# Altium PCB EE194_YESDIG_PCB.PcbDoc
Units mil, origin at the board's own origin, x right, y up, seen from the top; angles counter-clockwise.
Board outline 1999.9 x 1998.7 mil, 2 copper layers (Top Layer, Bottom Layer); 48 components, 59 nets, 226 pads, 72 vias.
Unrouted connection lines stored in the file: 50.
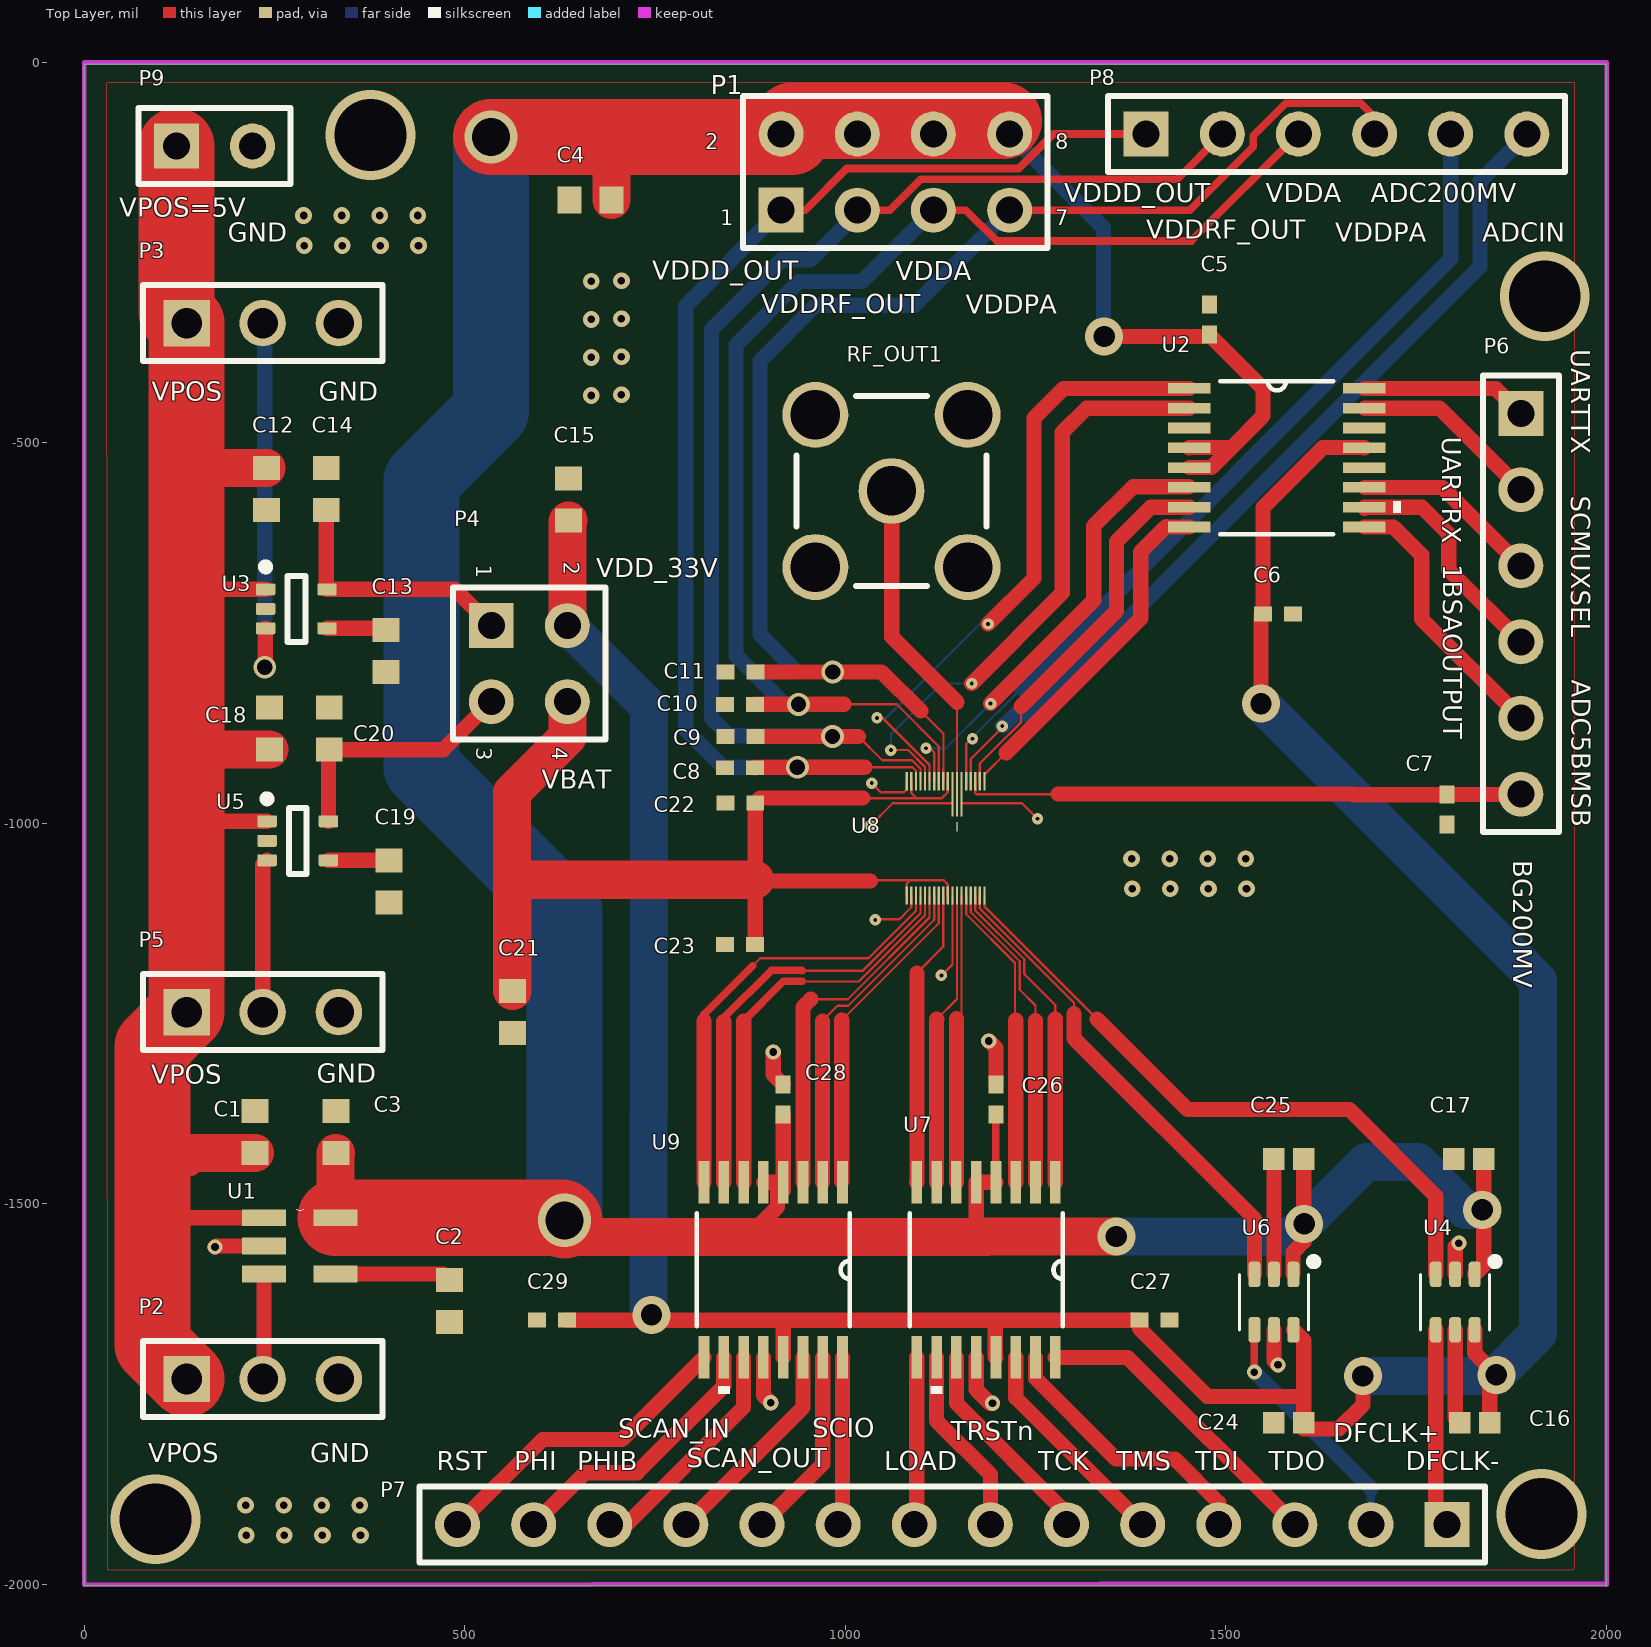
[diagram p0: Top Layer view]
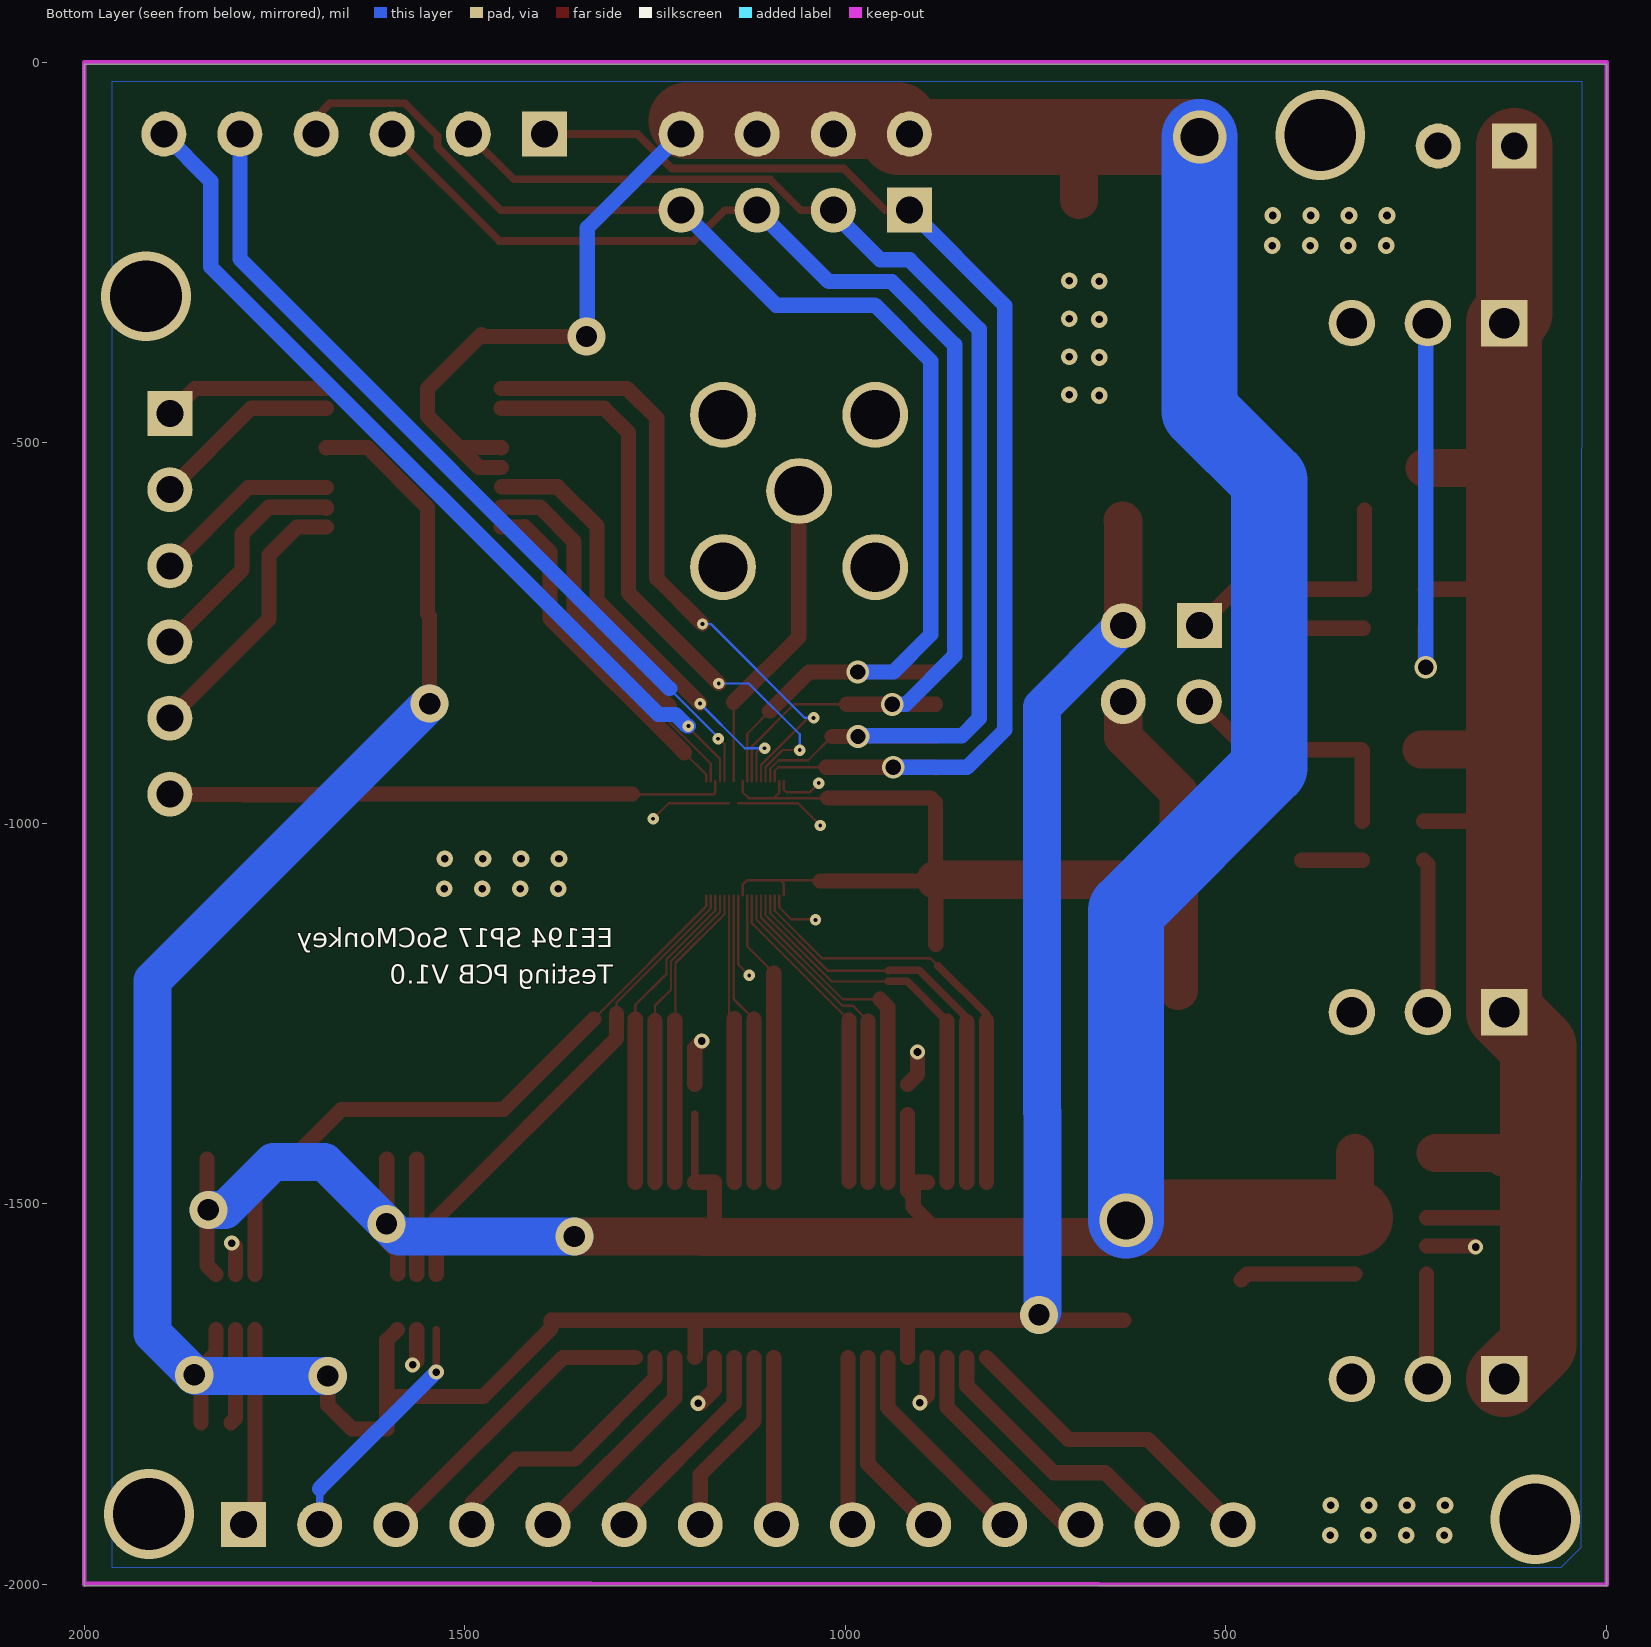
[diagram p1: Bottom Layer view, seen from below]

## Layer stack, top to bottom
Top Solder: solder mask 0.4, Solder Resist, Dk 3.5
Top Layer: signal copper 1.4
Dielectric 1: dielectric 12.6, FR-4, Dk 4.8
Bottom Layer: signal copper 1.4
Bottom Solder: solder mask 0.4, Solder Resist, Dk 3.5

## Board outline
0,-3.1 0,-2001.8 1999.9,-2001.8 1999.9,-3.1

## Design rules (kind name [scope] priority, off if disabled: settings)
Clearance Clearance_1 [InPolygon] p1: gap=10 ignorepadtopadclearanceinfootprint=FALSE
Clearance [All] p2: gap=3 ignorepadtopadclearanceinfootprint=FALSE
MinimumAnnularRing MinimumAnnularRing_Via [IsVia] p1: minimumring=5
MinimumAnnularRing MinimumAnnularRing_Component [All] p2: minimumring=7
MinimumSolderMaskSliver [All] p1: minsoldermaskwidth=3
PolygonConnect [All] p1: connectstyle=Relief reliefconductorwidth=10 reliefentries=4 polygonreliefangle="90 Angle" airgapwidth=10
RoutingVias RoutingVias_Power [(InNet('VPOS') OR InNet('GND') OR InNet('VBAT') OR InNet('VDD_08V') OR InNet('VDD_33V'))] p1: holewidth=50 width=80 viastyle="Through Hole" minholewidth=5 minwidth=15 maxholewidth=100 maxwidth=120
RoutingVias [All] p2: holewidth=10 width=18 viastyle="Through Hole" minholewidth=5 minwidth=15 maxholewidth=20 maxwidth=30
SilkToSilkClearance [All] p1: silktosilkclearance=6
SilkToSolderMaskClearance [IsPad] p1: minsilkscreentomaskgap=6 clearancetoexposedcopper=TRUE
SolderMaskExpansion [All] p1: expansion=4
Width Width_Power [(InNet('VPOS') OR InNet('GND') OR InNet('VBAT') OR InNet('VDD_08V') OR InNet('VDD_33V'))] p1: maxlimit=100 minlimit=3 preferedwidth=50 minimp=50.000000 maximp=50.000000 favimp=50.000000
Width [All] p2: maxlimit=50 minlimit=3 preferedwidth=20 minimp=50.000000 maximp=50.000000 favimp=50.000000
27 further rules are at their usual default settings.

## Components (designator, comment, footprint, x,y, rotation, side; value= is the part's Value field where it differs from the comment)
C1 "Cap Semi" 1608[0603] 224.41,-1405.51 r270 top value=1uF
C2 "Cap Semi" 1608[0603] 480,-1627.44 r90 top value=10nF
C3 "Cap Semi" 1608[0603] 330.71,-1405.51 r270 top value=1uF
C4 "Cap Semi" 1608[0603] 665.35,-181.1 r0 top value=1uF
C5 "Cap Semi" 0402 1478.1,-338.3 r270 top value=100nF
C6 "Cap Semi" 0402 1568.5,-724.9 r180 top value=1uF
C7 "Cap Semi" 0402 1790.4,-981.8 r90 top value=100nF
C8 "Cap Semi" 0402 861.8,-927 r0 top value=100nF
C9 "Cap Semi" 0402 862.4,-885.8 r0 top value=100nF
C10 "Cap Semi" 0402 861.8,-843.7 r0 top value=100nF
C11 "Cap Semi" 0402 862.2,-801.1 r0 top value=100nF
C12 "Cap Semi" 1608[0603] 239.38,-560.76 r90 top value=1uF
C13 "Cap Semi" 1608[0603] 396.86,-773.35 r90 top value=10nF
C14 "Cap Semi" 1608[0603] 318.12,-560.76 r270 top value=1uF
C15 "Cap Semi" 1608[0603] 636.1,-574.6 r270 top value=1uF
C16 "CAP 1uF 16V 0402(1005)" CAPC0402(1005)60_M 1826.77,-1787.4 r180 top value=1uF
C17 "CAP 1uF 16V 0402(1005)" CAPC0402(1005)60_M 1818.9,-1440.94 r180 top value=1uF
C18 "Cap Semi" 1608[0603] 243.32,-875.72 r270 top value=1uF
C19 "Cap Semi" 1608[0603] 400.8,-1076.5 r90 top value=10nF
C20 "Cap Semi" 1608[0603] 322.06,-875.72 r270 top value=1uF
C21 "Cap Semi" 1608[0603] 562.99,-1248.03 r90 top value=1uF
C22 "Cap Semi" 0402 862,-973.1 r0 top value=100nF
C23 "Cap Semi" 0402 861.8,-1159 r0 top value=100nF
C24 "CAP 1uF 16V 0402(1005)" CAPC0402(1005)60_M 1582.68,-1787.4 r180 top value=1uF
C25 "CAP 1uF 16V 0402(1005)" CAPC0402(1005)60_M 1582.68,-1440.94 r180 top value=1uF
C26 "Cap Semi" 0402 1197.8,-1362.8 r270 top value=100nF
C27 "Cap Semi" 0402 1406.3,-1652.7 r180 top value=1uF
C28 "Cap Semi" 0402 918.4,-1362.7 r270 top value=100nF
C29 "Cap Semi" 0402 614.4,-1652.7 r0 top value=1uF
P1 "Header 4X2" HDR2X4 915.75,-194.49 r0 top
P2 "TSW-103-07-F-S" SMTC-TSW-103-07-X-S 134.65,-1730 r0 top
P3 "TSW-103-07-F-S" SMTC-TSW-103-07-X-S 134.65,-342.9 r0 top
P4 "Header 2X2" HDR2X2 534.9,-740.2 r270 top
P5 "TSW-103-07-F-S" SMTC-TSW-103-07-X-S 134.65,-1248.03 r0 top
P6 "Header 6" HDR1X6 1887.4,-461.72 r270 top
P7 "Header 14" HDR1X14 1790.55,-1921.26 r180 top
P8 "Header 6" HDR1X6 1395.28,-94.49 r0 top
P9 "Header 2" HDR1X2 121.26,-110.24 r0 top
RF_OUT1 "32K101-400L5" ROS-32K101-400L5_V 1060.7,-563.4 r0 top
U1 "LDK130M08R" SOT95P290X145-5N 283.46,-1555.12 r0 top
U2 "MAX13003EEUE-T" 21-0066J_16 1566.93,-519.68 r0 top value=Value
U3 "TPS71733DCKR" DCK0005A_L 278.75,-718.24 r0 top
U4 "74AVC1T45" ONSC-SC-88-6-419B-02_L 1826.77,-1592.52 r180 top
U5 "TPS71712DCKR" DCK0005A_L 280.68,-1022.96 r0 top
U6 "74AVC1T45" ONSC-SC-88-6-419B-02_L 1588.58,-1592.52 r180 top
U7 "MAX13003EEUE-T" 21-0066J_16 1184.92,-1586.61 r270 top value=Value
U8 "194_Digital" "EE194_Analog_Chip - 3 mil" 1141.73,-1019.69 r0 top
U9 "MAX13003EEUE-T" 21-0066J_16 905.39,-1586.61 r270 top value=Value

## Footprints (in the part's own frame and the unit in brackets; to place one, negate y for a bottom-side part, rotate by r counter-clockwise, add the part's x,y. Pads: shape width x height; smd on the part's side, far side on the other; paste and mask are expansions set on the pad)
21-0066J_16 [mil]
  rect 56x14 smd mask+3.5: 1(-115,91) 2(-115,65) 3(-115,39) 4(-115,13) 5(-115,-13) 6(-115,-39) 7(-115,-65) 8(-115,-91) 9(115,-91) 10(115,-65) 11(115,-39) 12(115,-13) 13(115,13) 14(115,39) 15(115,65) 16(115,91)
  silkscreen extent -74,-100 163,100
0402 [mm] "Chip Capacitor, Body 1.0x0.5mm, IPC High Density"
  rect 0.6x0.5 smd: 1(-0.5,0) 2(0.5,0)
  body extent -0.55,-0.3 0.55,0.3, height 1.3
1608[0603] [mm] "Chip Capacitor, Body 1.6x0.8mm, IPC High Density"
  rect 0.8x0.9 smd: 1(-0.7,0) 2(0.7,0)
  body extent -0.87,-0.48 0.87,0.48, height 1.3
CAPC0402(1005)60_M [mm] "Chip Capacitor, Body 1.0x0.5mm, Height 0.6mm, IPC Low Density"
  rect 0.72x0.72 smd: 1(-0.5,0) 2(0.5,0)
  body extent -0.55,-0.3 0.55,0.3, height 0.6
DCK0005A_L [mm] "SOT23, 5-Leads, Body 2.15x1.4mm, Pitch 0.65mm, IPC High Density"
  rrect25% 0.65x0.4 smd mask+0.061: 1(-1.025,0.65) 2(-1.025,0) 3(-1.025,-0.65) 4(1.025,-0.65) 5(1.025,0.65)
  silkscreen extent -1.15,-1.1 0.3,1.52, body extent -1.14,-1 1.14,1, height 0.94
"EE194_Analog_Chip - 3 mil" [mil]
  rect 3x24 smd paste-3 mask+4: 1(-61,75) 2(-55,75) 3(-49,75) 4(-43,75) 5(-37,75) 6(-31,75) 7(-25,75) 8(-19,75) 9(-13,75) 10(-7,75) 11(-1,75) 12(5,75) 13(11,75) 14(17,75) 15(23,75) 16(29,75) 17(35,75) 18(41,75) 19(41,-75) 20(35,-75) 21(29,-75) 22(23,-75) 23(17,-75) 24(11,-75) 25(5,-75) 26(-1,-75) 27(-7,-75) 28(-13,-75) 29(-19,-75) 30(-25,-75) 31(-31,-75) 32(-37,-75) 33(-43,-75) 34(-49,-75) 35(-55,-75) 36(-61,-75)
  rect 3x35 smd paste-3 mask-3: 11(-1,46) 12(5,46) 13(11,46)
  silkscreen extent 5,9 5,21
HDR1X2 [mm] "Connector; Header; 2 Position"
  rect 1.5x1.5 hole 0.9: 1(0,0)
  round 1.5 hole 0.9: 2(2.54,0)
  silkscreen extent -1.27,-1.27 3.81,1.27
HDR1X6 [mm] "Connector; Header; 6 Position"
  rect 1.5x1.5 hole 0.9: 1(0,0)
  round 1.5 hole 0.9: 2(2.54,0) 3(5.08,0) 4(7.62,0) 5(10.16,0) 6(12.7,0)
  silkscreen extent -1.27,-1.27 13.97,1.27
HDR1X14 [mm] "Connector; Header; 14 Position"
  rect 1.5x1.5 hole 0.9: 1(0,0)
  round 1.5 hole 0.9: 2(2.54,0) 3(5.08,0) 4(7.62,0) 5(10.16,0) 6(12.7,0) 7(15.24,0) 8(17.78,0) 9(20.32,0) 10(22.86,0) 11(25.4,0) 12(27.94,0) 13(30.48,0) 14(33.02,0)
  silkscreen extent -1.27,-1.27 34.29,1.27
HDR2X2 [mm] "Connector; Header; 2x2 Position"
  rect 1.5x1.5 hole 0.9: 1(0,0)
  round 1.5 hole 0.9: 2(0,2.54) 3(2.54,0) 4(2.54,2.54)
  silkscreen extent -1.27,-1.27 3.81,3.81
HDR2X4 [mm] "Connector; Header; 4x2 Position"
  rect 1.5x1.5 hole 0.9: 1(0,0)
  round 1.5 hole 0.9: 2(0,2.54) 3(2.54,0) 4(2.54,2.54) 5(5.08,0) 6(5.08,2.54) 7(7.62,0) 8(7.62,2.54)
  silkscreen extent -1.27,-1.27 8.89,3.81
ONSC-SC-88-6-419B-02_L [mm] "SOT363, 6-Leads, Body 2x1.25mm, Pitch 0.65mm, IPC High Density"
  rrect50% 0.4x0.85 smd mask+0.061: 1(0,0) 2(0.65,0) 3(1.3,0) 4(1.3,1.85) 5(0.65,1.85) 6(0,1.85)
  silkscreen extent -0.8,-0.55 1.8,1.85, body extent -0.43,-0.38 1.73,2.22, height 1.1
ROS-32K101-400L5_V [mm] "SMA Straight Jack, 6.35x6.35x9.5mm, Rosenberger Recommended"
  round 2.2 hole 1.65: 1(0,0) MH(-2.54,-2.54) MH(-2.54,2.54) MH(2.54,-2.54) MH(2.54,2.54)
  silkscreen extent -3.17,-3.18 3.18,3.17, body extent -3.17,-3.17 3.18,3.18, height 9.5
SMTC-TSW-103-07-X-S [mm] ".025 SQ Post Terminal Strip Assembly, 1x3 Pins, Vertical, 2.54mm Pitch, Male"
  rect 1.55x1.55 hole 1.02: 1(0,0)
  round 1.55 hole 1.02: 2(2.54,0) 3(5.08,0)
  silkscreen extent -1.46,-1.27 6.54,1.27, body extent -1.27,-1.27 6.35,1.27, height 8.38
SOT95P290X145-5N [mil]
  rect 58x22 smd: 1(-47,37) 2(-47,0) 3(-47,-37) 4(47,-37) 5(47,37)
  silkscreen extent -5,47 5,48

## Part data
C1 C2 C3 C4 C5 C6 C7 C8 C9 C10 C11 C12 C13 C14 C15 C18 C19 C20 C21 C22 C23 C26 C27 C28 C29: "Capacitor (Semiconductor SIM Model)", LatestRevisionDate=29-May-2009, LatestRevisionNote="IPC-7351 Footprint Added.", PackageDescription="Chip Capacitor", PackageReference=C1206, Published=8-Jun-2000, Publisher="Altium Limited"
C16 C17 C24 C25: library part CMP-1034-02119-1, "CAP 1uF 16V ±10% 0402 (1005 Metric) Thickness 0.6mm SMD", Case-EIA=0402, Case-Metric=1005, Rated Voltage="16 V", Tolerance=±10%, Max Thickness="0.6 mm", Technology=SMT
P1: "Header, 4-Pin, Dual row", LatestRevisionDate=17-Jul-2002, LatestRevisionNote="Re-released for DXP Platform.", Publisher="Altium Limited"
P2 P3 P5: library part CMP-1024-00331-1, "0.025\" SQ Post Header, Through-hole, Vertical, -55 to 125 degC, 2.54 mm Pitch, 3-Pin, Male, RoHS", Manufacturer=Samtec, Temperature Range="-55 to 125 degC", ComponentLink1Description="Manufacturer URL", ComponentLink1URL=http://www.samtec.com, ComponentLink2Description=Datasheet, ComponentLink2URL=http://www.samtec.com/documents/webfiles/pdf/TSW_TH.PDF, ComponentLink3Description="Package Specification", ComponentLink3URL=http://www.samtec.com/documents/webfiles/cpdf/TSW-XXX-XX-XXX-X-XX-XXX-MKT.pdf, DatasheetVersion=F-214, Mounting Technology=Through-hole, Orientation=Vertical, PackageDescription=".025[0.64] SQ. Post Terminal Strip Assembly", PackageReference=TSW-103-07-X-S, PackageVersion="DM, 8/1988", PartNumber=TSW-103-07-F-S, Pitch="2.54 mm", RoHS=True
P4: "Header, 2-Pin, Dual row", LatestRevisionDate=17-Jul-2002, LatestRevisionNote="Re-released for DXP Platform.", Publisher="Altium Limited"
P6 P8: "Header, 6-Pin", LatestRevisionDate=17-Jul-2002, LatestRevisionNote="Re-released for DXP Platform.", Publisher="Altium Limited"
P7: "Header, 14-Pin", LatestRevisionDate=17-Jul-2002, LatestRevisionNote="Re-released for DXP Platform.", Publisher="Altium Limited"
P9: "Header, 2-Pin", LatestRevisionDate=17-Jul-2002, LatestRevisionNote="Re-released for DXP Platform.", Publisher="Altium Limited"
RF_OUT1: library part CMP-0751-00001-1, "SMA Straight Jack, Up to 18 GHz, -55 to 155 degC", Manufacturer=Rosenberger, ComponentLink1Description="Manufacturer URL", ComponentLink1URL=http://www.rosenberger.de, ComponentLink2Description=Datasheet, ComponentLink2URL=http://rosenberger.de/ok/images/documents/db/32K101-400L5.pdf, ComponentLink3Description="Package Specification", ComponentLink3URL=http://rosenberger.de/ok/images/documents/db/32K101-400L5.pdf, ComponentLink4Description="Series Overview / Design Note", ComponentLink4URL=http://rosenberger.de/ok/images/documents/spez/32.pdf, ComponentLink5Description="Webshop / RFQ", ComponentLink5URL=http://www.rosenberger.com/en/contact/sales/, DatasheetVersion=a00, Design Note="Footprint in library is a generic example - only application specific footprint delivers High Performance", Mounting Technology="Through Hole", PackageDescription="SMA Straight Jack, 6.35 x 6.35 x 9.5 mm", PackageReference=32K101-400L5, PackageVersion=a00, PartNumber=32K101-400L5
U1: "300 mA low quiescent current very low noise LDO (800mV)"
U2 U7 U9: "Imported", Manufacturer_Name=Maxim, Manufacturer_Part_Number=MAX13003EEUE-T, RefDes=RefDes, Type=Type, Vendor=Maxim
U3: library part TI-TPS79NXX-YYSOT5, "Single Output High PSRR LDO, 150 mA, Fixed 1.2 V Output, 2.5 to 6.5 V Input, 5-pin SC70 (DCK), -40 to 125 degC, Green (RoHS & no Sb/Br)", Manufacturer="Texas Instruments", PartNumber=TPS71712DCKR, Accuracy(%)=3, Code_JEDEC=MO-203, ComponentLink1Description="Manufacturer URL", ComponentLink1URL=http://www.ti.com/, ComponentLink2Description=Datasheet, ComponentLink2URL=http://www.ti.com/general/docs/lit/getliterature.tsp?genericPartNumber=TPS71712&fileType=pdf, ComponentLink3Description="Package Specification", ComponentLink3URL=http://www.ti.com/litv/pdf/mpds025f, DatasheetVersion=SBVS068G, Eco-Plan="Green (RoHS & no Sb/Br)", Fixed Output Options(V)=1.2, Iout(Max)(A)=0.15, Iq(Typ)(mA)=0.05, Mounting Technology="Surface Mount", PackageDescription="5-Pin Plastic Small-Outline, Body 2 x 1.25 mm, Pitch 0.65 mm", PackageReference=DCK0005A, PackageVersion=4093553-3/G, SubFamily="Single Channel LDO", Vdo(Typ)(mV)=170, Vin(Max)(V)=6.5, Vin(Min)(V)=2.5, Vout Adj(Max)(V)=1.2, Vout Adj(Min)(V)=1.2
U5: library part TI-TPS79NXX-YYSOT5, "Single Output High PSRR LDO, 150 mA, Fixed 1.2 V Output, 2.5 to 6.5 V Input, 5-pin SC70 (DCK), -40 to 125 degC, Green (RoHS & no Sb/Br)", Manufacturer="Texas Instruments", Accuracy(%)=3, Code_JEDEC=MO-203, ComponentLink1Description="Manufacturer URL", ComponentLink1URL=http://www.ti.com/, ComponentLink2Description=Datasheet, ComponentLink2URL=http://www.ti.com/general/docs/lit/getliterature.tsp?genericPartNumber=TPS71712&fileType=pdf, ComponentLink3Description="Package Specification", ComponentLink3URL=http://www.ti.com/litv/pdf/mpds025f, DatasheetVersion=SBVS068G, Eco-Plan="Green (RoHS & no Sb/Br)", Fixed Output Options(V)=1.2, Iout(Max)(A)=0.15, Iq(Typ)(mA)=0.05, Mounting Technology="Surface Mount", PackageDescription="5-Pin Plastic Small-Outline, Body 2 x 1.25 mm, Pitch 0.65 mm", PackageReference=DCK0005A, PackageVersion=4093553-3/G, PartNumber=TPS71712DCKR, SubFamily="Single Channel LDO", Vdo(Typ)(mV)=170, Vin(Max)(V)=6.5, Vin(Min)(V)=2.5, Vout Adj(Max)(V)=1.2, Vout Adj(Min)(V)=1.2

## Via types
v1: diameter 22, hole 10, Top Layer to Bottom Layer, 32 vias
v2: diameter 15, hole 5, Top Layer to Bottom Layer, 13 vias
v3: diameter 50, hole 28, Top Layer to Bottom Layer, 8 vias
v4: diameter 20, hole 10, Top Layer to Bottom Layer, 8 vias
v5: diameter 30, hole 20, Top Layer to Bottom Layer, 5 vias
v6: diameter 118.11, hole 94.49, Top Layer to Bottom Layer, 4 vias
v7: diameter 70, hole 50, Top Layer to Bottom Layer, 2 vias

## Nets (pads, with @x,y where several pads share a name; then routed paths per layer and width w, separated by ;. In a path a pad name is that pad's centre, name@x,y a point inside that pad or via, vN(x,y) a via of type N, cw(c..) or ccw(c..) an arc to the next point about the centre after c; other vN are vias at no path point)
1BSAOUTPUT: U2.7 U8.17 | length 504.3
  Top Layer w3: U8.17 1176.73,-921.47 1197,-901.2 1230.8,-867.39 1230.8,-846.7 ; U2.7@1451.44,-584.2 U2.7
  Top Layer w20: 1230.8,-846.7 1230.8,-846.6 1356.3,-721.1 1356.3,-629.7 1401.32,-584.68 U2.7
1BSAOUTPUT_33: P6.4 U2.10 | length 307.7
  Top Layer w20: U2.10@1681.93,-586.06 U2.10 1757.28,-584.68 1792.7,-620.1 1792.7,-667.02 P6.4
ADC5BMSB: U2.8 U8.18 | length 466.3
  Top Layer w3: U8.18 1182.73,-935.97 1211.5,-907.2 ; U2.8@1450.31,-612.3 U2.8
  Top Layer w20: 1211.5,-907.2 1388,-730.7 1388,-643.7 1421.5,-610.2 1421.99,-610.68 U2.8
ADC5BMSB_33: P6.5 U2.9 | length 358.6
  Top Layer w20: U2.9 1720.28,-610.68 1757.1,-647.5 1757.1,-731.42 P6.5
ADC200MV: P8.5 U8.14 | length 1118.2
  Top Layer w3: U8.14 1158.73,-895.37 1167.1,-887 v2(1167.1,-889)
  Bottom Layer w3: v2(1167.1,-889) 1167.1,-887 1230.7,-823.4 1230.7,-822.8
  Bottom Layer w20: 1230.7,-822.8 1231.3,-822.8 1795.28,-258.82 P8.5
ADCIN: P8.6 U8.15 | length 1167
  Top Layer w3: U8.15 1164.73,-915.47 1206.1,-874.1 v2(1206.1,-872.3)
  Bottom Layer w20: v2(1206.1,-872.3) 1207.9,-872.3 1223.2,-857 1245.6,-857 1833.7,-268.9 1833.7,-156.06 P8.6
ANT: RF_OUT1.1 U8.12 | length 416.9
  Top Layer w3: U8.12@1146.73,-944.69 1146.73,-840.83
  Top Layer w10: RF_OUT1.1 RF_OUT1.1@1061.1,-563.8
  Top Layer w20: RF_OUT1.1@1061.1,-563.8 1061.1,-755.2 1146.73,-840.83
BG200MV: C7.2 P6.6 U8.16 | length 741.7
  Top Layer w3: U8.16 1170.73,-960.31 1172.33,-961.9 1279.1,-961.9 1279.4,-961.6
  Top Layer w20: 1279.4,-961.6 1666.7,-961.6 1667.5,-962.4 1790.11,-962.4 C7.2 ; C7.2@1782.4,-962.11 1887.01,-962.11 P6.6
DIFFCLK+: U6.3 U8.20 | length 647.2
  Top Layer w3: U8.20 1176.73,-1111.88 1300.5,-1235.64 1300.5,-1250.2
  Top Layer w20: 1300.5,-1250.2 1300.5,-1282.6 1537.4,-1519.5 U6.3
DIFFCLK+33: P7.2 U6.4 | length 319.3
  Top Layer w10: v4(1537.4,-1720.9) U6.4
  Bottom Layer w10: P7.2 1690.55,-1874.05
  Bottom Layer w20: v4(1537.4,-1720.9) 1690.55,-1874.05
DIFFCLK-: U4.3 U8.19 | length 868.1
  Top Layer w3: U8.19 1182.73,-1109.33 1182.93,-1109.33 1330.5,-1256.9
  Top Layer w20: 1330.5,-1256.9 1330.5,-1257.1 1449.4,-1376 1662.1,-1376 1775.59,-1489.49 U4.3
DIFFCLK-33: P7.1 U4.4 | length 262.1
  Top Layer w10: P7.1@1775.59,-1906.3 P7.1
  Top Layer w20: P7.1@1775.59,-1906.3 U4.4
GND: C1.1 C2.1 C3.1 C4.1 C5.1 C6.1 C7.1 C8.1 C9.1 C10.1 C11.1 C12.1 C13.1 C14.1 C15.1 C16.2 C17.2 C18.1 C19.1 C20.1 C21.1 C22.1 C23.1 C24.2 C25.2 C26.1 C27.1 C28.1 C29.1 P2.3 P3.3 P5.3 P9.2 RF_OUT1.MH U1.2 U2.12 U3.2 U4.2 U4.5 U5.2 U6.2 U6.5 U7.12 U8.1 U8.11 U8.13 U8.26 U8.35 U9.12 | length 1155.3
  Top Layer w3: v2(1033,-1002.9) 1062.21,-973.69 U8.11@1140.73,-973.69 ; v2(1039.2,-1126.9) 1040.2,-1125.9 1071.2,-1125.9 1086.73,-1110.37 U8.35 ; v2@1041.2,-947.2 v2(1034.8,-947.2) 1047,-959.4 1051.1,-959.4 1051.3,-959.2 1077.2,-959.2 1080.73,-955.67 U8.1 ; v2(1126.3,-1199.8) 1140.73,-1185.37 U8.26 ; U8.13@1152.73,-973.69 1232.09,-973.69 v2(1252.5,-994.1)
  Top Layer w20: v4(172,-1556.6) 173.48,-1555.12 U1.2 ; U9.12 892.39,-1751.49 v4(902,-1761.1) ; v4(905.2,-1300.4) 905.2,-1329.81 C28.1 ; U7.12 1171.92,-1743.62 1190.2,-1761.9 v4(1193.4,-1761.9) ; v4(1188.5,-1285.9) 1197.8,-1295.2 C26.1 ; U6.5 1562.99,-1706.09 v4(1568.4,-1711.5) ; U6.2 C25.2 ; U4.5 1801.18,-1781.5 C16.2 ; U4.2 1801.18,-1556.32 v4(1806,-1551.5)
  other v1: 213.1,-1935.2 263.1,-1935.2 313.1,-1935.2 363.1,-1935.2 212.2,-1895.7 262.2,-1895.7 312.2,-1895.7 362.2,-1895.7 1377,-1086.1 1427,-1086.1 1477,-1086.1 1527,-1086.1 1376.1,-1046.6 1426.1,-1046.6 1476.1,-1046.6 1526.1,-1046.6 666.4,-438 705.9,-437.1 666.4,-388 705.9,-387.1 666.4,-338 705.9,-337.1 666.4,-288 705.9,-287.1 289.3,-241.1 339.3,-241.1 389.3,-241.1 439.3,-241.1 288.4,-201.6 338.4,-201.6 388.4,-201.6 438.4,-201.6
LOAD: U7.8 U8.28 | length 391.3
  Top Layer w3: 1094.1,-1196.5 1128.73,-1161.87 U8.28
  Top Layer w20: U7.8 1094.1,-1471.44 1094.1,-1196.5
LOAD33: P7.8 U7.9 | length 221
  Top Layer w20: P7.8 1093.92,-1917.89 U7.9
NetC2_2: C2.2 U1.4 | length 152.8
  Top Layer w20: U1.4 472.24,-1592.12 C2.2
NetC13_2: C13.2 U3.4 | length 78.6
  Top Layer w10: C13.2@394.89,-743.83 C13.2
  Top Layer w20: U3.4 C13.2@394.89,-743.83
NetC14_2: C14.2 P4.1 U3.5 | length 340.2
  Top Layer w10: U3.5@318.12,-691.66 U3.5
  Top Layer w20: U3.5@318.12,-691.66 C14.2 ; U3.5 487.34,-692.64 P4.1
NetC19_2: C19.2 U5.4 | length 79.9
  Top Layer w10: C19.2@400.4,-1048.55 C19.2
  Top Layer w20: U5.4 C19.2@400.4,-1048.55
NetC20_2: C20.2 P4.3 U5.5 | length 333.5
  Top Layer w10: C20.2@321.03,-904.3 C20.2
  Top Layer w20: U5.5 C20.2@321.03,-904.3 ; C20.2 471.83,-903.27 P4.3
NetP2_2: P2.2 U1.3 | length 138.6
  Top Layer w10: P2.2 P2.2@236.46,-1728.18
  Top Layer w20: P2.2@236.46,-1728.18 U1.3
NetP3_2: P3.2 U3.3 | length 504.6
  Top Layer w20: v5(237.4,-794.9) 238.4,-793.9 U3.3
  Bottom Layer w20: P3.2 237.4,-345.65 v5(237.4,-794.9)
NetP5_2: P5.2 U5.3 | length 201.8
  Top Layer w20: P5.2 234.65,-1054.23 U5.3
PHI: U8.33 U9.7 | length 555.1
  Top Layer w3: U9.7 U9.7 ; 943.1,-1193.5 1023.3,-1193.5 1098.73,-1118.07 U8.33
  Top Layer w10: 840.44,-1260.5 840.44,-1255.66 903.1,-1193 942.6,-1193 943.1,-1193.5
  Top Layer w20: U9.7 840.44,-1260.5
PHI_33: P7.13 U9.10 | length 362.8
  Top Layer w20: P7.13 658.81,-1853 726.6,-1853 840.39,-1739.21 U9.10
PHIB: U8.32 U9.6 | length 533.8
  Top Layer w3: U9.6 U9.6@866.5,-1471.51 ; 943.3,-1207.7 1017.8,-1207.7 1104.73,-1120.77 U8.32
  Top Layer w10: 866.5,-1259.7 918.5,-1207.7 943.3,-1207.7
  Top Layer w20: U9.6@866.5,-1471.51 866.5,-1259.7
PHIB_33: P7.12 U9.11 | length 305.2
  Top Layer w20: P7.12 691.3,-1920.51 712.99,-1920.51 866.39,-1767.11 U9.11
RESET: U8.34 U9.8 | length 575.6
  Top Layer w3: 878.3,-1187 888.1,-1177.2 1030.5,-1177.2 1092.73,-1114.97 U8.34
  Top Layer w10: 814.39,-1259.5 814.39,-1250.91 878.3,-1187
  Top Layer w20: U9.8 814.39,-1259.5
RESET_33: P7.14 U9.9 | length 414.8
  Top Layer w20: P7.14 602.51,-1809.3 706.71,-1809.3 U9.9
SC_MUX_SEL: U2.6 U8.7 | length 595.3
  Top Layer w3: v2(1106,-901.5) 1111.1,-901.5 1116.73,-907.13 U8.7
  Top Layer w20: v2(1190.8,-842.7) 1326.3,-707.2 1326.3,-609.6 1377.9,-558 U2.6@1451.24,-558
  Bottom Layer w3: v2(1106,-901.5) 1132,-901.5 v2(1190.8,-842.7)
SC_MUX_SEL33: P6.3 U2.11 | length 248.2
  Top Layer w20: U2.11 1784.36,-558.68 P6.3
SCAN_IN: U8.31 U9.3 | length 474.4
  Top Layer w3: 954.6,-1231.1 1003.3,-1231.1 1110.73,-1123.67 U8.31
  Top Layer w20: U9.3 944.39,-1241.31 954.6,-1231.1
SCAN_IN33: P7.11 U9.14 | length 283.4
  Top Layer w20: P7.11 944.39,-1767.42 U9.14
SCAN_OUT: U8.30 U9.2 | length 445.8
  Top Layer w3: U9.2@970.19,-1471.41 U9.2 ; 970.19,-1259.51 989.9,-1239.8 1003.7,-1239.8 1116.73,-1126.77 U8.30
  Top Layer w20: U9.2@970.19,-1471.41 970.19,-1259.51
SCAN_OUT33: P7.10 U9.15 | length 252.7
  Top Layer w20: P7.10 970.39,-1841.42 U9.15
SCIO01: U8.29 U9.1 | length 430.2
  Top Layer w3: U9.1@995.28,-1470.5 U9.1 ; 995.28,-1258.82 1122.73,-1131.37 U8.29
  Top Layer w20: U9.1@995.28,-1470.5 995.28,-1258.82
SCIO0133: P7.9 U9.16 | length 222.1
  Top Layer w20: P7.9 996.39,-1915.42 U9.16
TCK: U7.6 U8.24 | length 379.8
  Top Layer w3: 1145.9,-1256.7 1152.73,-1249.87 U8.24
  Top Layer w20: U7.6 1145.92,-1256.72
TCK_33: P7.6 U7.11 | length 279.6
  Top Layer w20: U7.11 1145.92,-1761.82 1290.55,-1906.45 P7.6
TDI: U7.2 U8.22 | length 412.2
  Top Layer w3: U8.22 1164.73,-1116.85 1229,-1181.11 1229,-1218.5 1249.92,-1239.42 1249.92,-1259.18
  Top Layer w20: U7.2 1249.92,-1259.18
TDI_33: P7.4 U7.15 | length 364.5
  Top Layer w20: U7.15 1249.92,-1729 1355.82,-1834.9 1432.9,-1834.9 1490.55,-1892.55 P7.4
TDO: U7.1 U8.21 | length 421.4
  Top Layer w3: U8.21 1170.73,-1114.36 1235,-1178.63 1235,-1197.8 1275.92,-1238.72 1275.92,-1257.08 ; U7.1@1275.3,-1470.99 U7.1
  Top Layer w20: U7.1 1275.92,-1257.08
TDO_33: P7.3 U7.16 | length 405.6
  Top Layer w20: U7.16 1370.91,-1701.61 P7.3
TMS: U7.3 U8.23 | length 404.6
  Top Layer w3: U8.23 1158.73,-1119.33 1223,-1183.6 1223,-1257.8 1223.5,-1258.3 ; U7.3@1223,-1470.69 U7.3
  Top Layer w20: U7.3 1223.92,-1258.72
TMS_33: P7.5 U7.14 | length 288.7
  Top Layer w20: U7.14 1223.92,-1754.63 P7.5
TRSTn: U7.7 U8.25 | length 388
  Top Layer w3: 1120.1,-1257.5 1146.73,-1230.87 U8.25
  Top Layer w20: U7.7 1119.92,-1257.68 1120.1,-1257.5
TRSTn_33: P7.7 U7.10 | length 248.9
  Top Layer w20: U7.10 1119.92,-1784.92 1190.55,-1855.55 P7.7
UARTRX: U2.2 U8.5 | length 786.5
  Top Layer w3: v2(1059.9,-903.8) 1082.68,-903.8 1104.73,-925.85 U8.5
  Top Layer w20: v2(1166.2,-816.3) 1284.9,-697.6 1284.9,-486.7 1316.8,-454.8 1451.81,-454.8 U2.2
  Bottom Layer w3: v2(1059.9,-903.8) 1059.9,-883.1 1126.7,-816.3 v2(1166.2,-816.3)
UARTRX_33: P6.2 U2.15 | length 249.8
  Top Layer w20: U2.15 1780.36,-454.68 P6.2
UARTTX: U2.1 U8.6 | length 828.9
  Top Layer w3: v2(1041.6,-861.5) 1048.87,-861.5 1110.73,-923.37 U8.6
  Top Layer w20: v2(1187.6,-738.2) 1247.7,-678.1 1247.7,-467.7 1286.72,-428.68 U2.1
  Bottom Layer w3: v2(1041.6,-861.5) 1053.3,-861.5 1176.6,-738.2 v2(1187.6,-738.2)
UARTTX_33: P6.1 U2.16 | length 219.2
  Top Layer w20: U2.16 1854.36,-428.68 P6.1
VBAT: C21.2 C22.2 C23.2 P4.4 U8.2 U8.10 U8.27 U8.36 | length 1737.3
  Top Layer w3: 1023.2,-966.8 1023.3,-966.9 1093.33,-966.9 ; 1032.9,-1075.8 1033.9,-1074.8 1085,-1074.8 ; U8.36 1080.73,-1079.07 1085,-1074.8 ; U8.2 1086.73,-960.31 1093.33,-966.9 ; U8.27 1134.73,-1080.67 1134.9,-1080.5 1129.2,-1074.8 1085,-1074.8 ; U8.10 1134.73,-959.17 1127,-966.9 1093.33,-966.9
  Top Layer w10: C23.2 C23.2@881.69,-1158.8
  Top Layer w20: 881.2,-1074.1 881.2,-1159.28 C23.2 ; C23.2@881.69,-1158.8 881.69,-1075.7 ; 1023.2,-966.8 887.99,-966.8 C22.2 881.69,-1075.7 ; 1032.9,-1075.8 881.79,-1075.8 881.69,-1075.7
  Top Layer w50: P4.4 634.9,-886.5 562,-959.4 562,-1219.48 C21.2 562.99,-1074.1 881.2,-1074.1
VDD_08V: C3.2 C4.2 C5.2 C17.1 C25.1 C26.2 C28.2 P1.2 P1.4 P1.6 P1.8 U1.5 U2.4 U2.5 U4.1 U6.1 U7.4 U7.5 U9.4 U9.5 | length 5468.6
  Top Layer w10: C26.2 1197.8,-1471.49 U7.4 ; U6.1@1588,-1591.94 U6.1 ; v3@1602.36,-1525.76 v3(1602.8,-1526.2)
  Top Layer w20: 871.5,-1543.3 910.85,-1503.95 910.85,-1490.07 ; U9.5 910.85,-1471.61 910.85,-1490.07 ; C28.2 918.4,-1482.52 910.85,-1490.07 ; 1171.92,-1528.3 U7.5 U7.4 ; v3(1340,-360.4) C5.2@1480.52,-360.4 ; U2.5 1481.22,-532.68 1507.7,-506.2 ; U2.4 1452.41,-506.2 1507.7,-506.2 ; C5.2 C5.2@1480.52,-360.4 ; U6.1@1588,-1591.94 1588,-1563.7 1602.8,-1548.9 v3(1602.8,-1526.2) ; v3@1602.36,-1525.76 C25.1 ; U4.1 1838.58,-1580.71 C17.1 ; C5.2@1480.52,-360.4 1548.81,-428.7 1548.81,-465.09 1507.7,-506.2
  Top Layer w50: U1.5 330.46,-1433.32 C3.2 ; v7(631.1,-1521.6) 652.8,-1543.3 871.5,-1543.3 1186.12,-1543.3 1186.52,-1542.9 v3(1356,-1542.9) ; C4.2 692.91,-107.99 702.6,-98.3
  Top Layer w100: U1.5 627.62,-1518.12 v7(631.1,-1521.6) ; v7(534.5,-98.3) 702.6,-98.3 929.91,-98.3 929.91,-77.02 P1.8@1208.51,-77.02
  Bottom Layer w20: P1.8 1339.03,-217.77 1339.03,-359.43 v3(1340,-360.4)
  Bottom Layer w50: v3(1356,-1542.9) 1586.1,-1542.9 v3(1602.8,-1526.2) 1684.1,-1444.9 1752,-1444.9 1814.9,-1507.8 v3(1836.7,-1507.8)
  Bottom Layer w100: v7(534.5,-98.3) 534.5,-458.4 443.1,-549.8 443.1,-926.9 631.1,-1114.9 v7(631.1,-1521.6)
VDD_33V: C6.2 C15.2 C16.1 C24.1 C27.2 C29.2 P4.2 U2.13 U4.6 U6.6 U7.13 U9.13 | length 4272.4
  Top Layer w3: 917.7,-1652.7 918.39,-1653.39
  Top Layer w10: C16.1 C16.1@1848.86,-1789.8
  Top Layer w20: C29.2 738.5,-1652.7 v3(745.5,-1645.7) 752.5,-1652.7 917.7,-1652.7 1197,-1652.7 ; U9.13 918.39,-1653.39 ; U7.13 1197,-1700.69 1197,-1652.7 ; v3(1546.1,-842.8) 1546.1,-727.61 C6.2 1548.81,-584.89 1627.3,-506.4 1681.64,-506.4 U2.13 ; U6.6 1602.36,-1679.13 1602.36,-1752.8 ; v3(1679.9,-1726) 1679.9,-1763.9 1648.1,-1795.7 1602.36,-1795.7 C24.1 1602.36,-1752.8 ; U4.6 1826.77,-1695.97 v3(1855.3,-1724.5) 1846.46,-1733.34 C16.1 ; 1197,-1652.7 C27.2 1386.61,-1663.81 1475.6,-1752.8 1602.36,-1752.8
  Top Layer w50: P4.2 634.9,-603.36 C15.2
  Bottom Layer w50: P4.2 741.9,-847.2 741.9,-1378.9 741.2,-1379.6 741.2,-1641.4 v3(745.5,-1645.7) ; v3(1546.1,-842.8) 1909.9,-1206.6 1909.9,-1669.9 v3(1855.3,-1724.5) 1853.8,-1726 v3(1679.9,-1726)
VDDA: C10.2 P1.5 P8.3 U8.8 | length 1714.2
  Top Layer w3: 998.1,-843.7 1067.5,-843.7 1122.73,-898.93 U8.8
  Top Layer w10: P1.5 1158.43,-194.49 1198.96,-235.02 1454.75,-235.02 P8.3
  Top Layer w20: C10.2 v5(938.4,-843.7) 998.1,-843.7
  Bottom Layer w20: v5(938.4,-843.7) 920.6,-843.7 856.3,-779.4 856.3,-371.4 938.7,-289 938.7,-288.4 1021.84,-288.4 P1.5
VDDD_OUT: C8.2 P1.1 P8.1 U8.3 | length 1650.2
  Top Layer w3: 1025.5,-926.2 1025.6,-926.3 1088.21,-926.3 1092.73,-930.82 U8.3
  Top Layer w10: P1.1 947.31,-194.49 1002,-139.8 1227.75,-139.8 1273.06,-94.49 P8.1
  Top Layer w20: C8.2 882.18,-926.3 v5(937,-926.3) 1025.4,-926.3 1025.5,-926.2
  Bottom Layer w20: P1.1 790.5,-319.74 790.5,-877.2 840.1,-926.8 840.7,-926.2 840.8,-926.3 v5(937,-926.3)
VDDPA: C11.2 P1.7 P8.4 U8.9 | length 1805.3
  Top Layer w3: 1099.2,-852.6 1128.9,-882.3 1128.9,-928.17 1128.73,-928.34 U8.9
  Top Layer w10: P1.7 1452.59,-194.49 1535.8,-111.28 1535.8,-96.65 1578.49,-53.96 1675.64,-53.96 1676.3,-53.3 1695.28,-72.28 P8.4
  Top Layer w20: C11.2 v5(983.6,-801.1) 1047.7,-801.1 1099.2,-852.6
  Bottom Layer w20: v5(983.6,-801.1) 936.8,-801.1 887.8,-752.1 887.8,-392.7 961.2,-319.3 1090.94,-319.3 P1.7
VDDRF_OUT: C9.2 P1.3 P8.2 U8.4 | length 1715.1
  Top Layer w3: 1017.4,-886 1048.6,-917.2 1087.6,-917.2 1098.73,-928.34 U8.4
  Top Layer w10: P1.3@1015.75,-199.45 P1.3 1058.43,-194.49 1098.96,-153.96 1435.8,-153.96 P8.2
  Top Layer w20: C9.2 882.29,-886 v5(983.3,-886) 1017.4,-886
  Bottom Layer w20: v5(983.3,-886) 982.4,-885.1 847.1,-885.1 824.2,-862.2 824.2,-351.1 915.5,-259.8 954,-259.8 1015.75,-198.05 P1.3
VPOS: C1.2 C12.2 C18.2 P2.1 P3.1 P5.1 P9.1 U1.1 U3.1 U5.1 | length 2291.9
  Top Layer w10: 134.65,-692.6 134.69,-692.64
  Top Layer w20: 134.65,-1519.1 135.63,-1518.12 U1.1 ; 134.68,-997.37 U5.1 ; 134.69,-692.64 U3.1 ; C1.2@223.93,-1433.55 C1.2 ; C12.2@238.4,-534.18 C12.2
  Top Layer w50: 134.65,-1439.7 141.27,-1433.07 C1.2 ; 134.65,-903.9 135.27,-903.27 C18.2 ; 134.65,-529.3 138.54,-533.2 C12.2
  Top Layer w100: P9.1 121.26,-329.51 P3.1 ; P3.1@126.61,-338.43 134.65,-346.46 134.65,-529.3 134.65,-692.6 134.65,-903.9 134.65,-997.4 P5.1 89.7,-1292.98 89.7,-1685.05 P2.1
pads on no net: U2.3 U2.14
copper on no net:
  other v6: 93.7,-1914.2 1914.8,-1907.5 1918.8,-307.6 376.1,-95.8

## Polygon pours and split planes (outlines as drawn)
GND on Top Layer "Top Layer-GND" (solid, shelved, pour order 11): 30.1,-27.5 31,-26.6 1957.7,-26.6 1957.7,-1978.2 1954.9,-1981 31.1,-1981
GND on Bottom Layer "Bottom Layer-GND" (solid, shelved, pour order 15): 31.9,-25.9 1963.5,-25.9 1963.4,-26 1963.4,-1977.3 59.6,-1977.3 33.2,-1950.9

## Keep-outs
Keep-Out Layer:
  lines w6: 2000,-2000 2000,0 0,0 0,-2000 2000,-1998.3

## Other copper
Top Layer:
  pour cut-out: 1072.5,-920.2 1202.49,-920.2 1202.8,-920.51 1202.8,-1112.4 1073.9,-1112.4 1072.4,-1110.9
Bottom Layer:
  pour cut-out: 1072.5,-920.2 1202.49,-920.2 1202.8,-920.51 1202.8,-1112.4 1073.9,-1112.4 1072.4,-1110.9

## Silkscreen, mask and mechanical layers (free items; w line width, h text height)
Top Overlay:
  text "VDDD_OUT" at 1287.4,-184.4 h25
  text "VDDA" at 1552.4,-184.4 h25
  text "ADC200MV" at 1690,-184.4 h25
  text "VPOS=5V" at 46,-202.9 h25
  text "VDDRF_OUT" at 1395.6,-231.9 h25
  text "GND" at 188.7,-235.8 h25
  text "VDDPA" at 1643.3,-236.07 h25
  text "ADCIN" at 1836.5,-236.07 h25
  text "VDDD_OUT" at 746.3,-285.7 h25
  text "VDDA" at 1066.3,-286.9 h25
  text "VDDRF_OUT" at 889.6,-330.2 h25
  text "VDDPA" at 1158.3,-330.8 h25
  text "UARTTX" at 1953.5,-377.2 h25 r270
  text "VPOS" at 88.8,-444.6 h25
  text "GND" at 308.2,-444.6 h25
  text "UARTRX" at 1784.2,-491.9 h25 r270
  text "SCMUXSEL" at 1953.5,-569.5 h25 r270
  text "1BSAOUTPUT" at 1785.4,-660 h25 r270
  text "VDD_33V" at 672.9,-676.9 h25
  text "ADC5BMSB" at 1954.1,-811.3 h25 r270
  text "VBAT" at 601.4,-954.7 h25
  text "BG200MV" at 1877.3,-1048.5 h25 r270
  text "GND" at 305.6,-1340.7 h25
  text "VPOS" at 88.5,-1341.9 h25
  text "SCAN_IN" at 702,-1806.9 h25
  text "SCIO" at 956.4,-1806.7 h25
  text "TRSTn" at 1138.3,-1810.4 h25
  text "DFCLK+" at 1640.8,-1812.8 h25
  text "VPOS" at 84.4,-1839.5 h25
  text "GND" at 297.4,-1839.5 h25
  text "SCAN_OUT" at 791.9,-1845.8 h25
  text "RST" at 463.4,-1849.97 h25
  text "PHI" at 565.1,-1849.97 h25
  text "PHIB" at 647.7,-1849.97 h25
  text "LOAD" at 1051,-1849.97 h25
  text "TCK" at 1253.4,-1849.97 h25
  text "TMS" at 1355.6,-1849.97 h25
  text "TDI" at 1459.7,-1849.97 h25
  text "TDO" at 1556.5,-1849.97 h25
  text "DFCLK-" at 1735.9,-1849.97 h25
Bottom Overlay:
  text "EE194 SP17 SoCMonkey" at 1304.7,-1162.5 h25
  text "Testing PCB V1.0" at 1304.7,-1211 h25

## Text inside footprints (layer, text, board x,y; h text height)
P1: Top Overlay "8" at 1275.75,-114.49 h20; Top Overlay "7" at 1275.75,-214.49 h20; Top Overlay "1" at 835.75,-214.49 h20; Top Overlay "2" at 815.75,-114.49 h20
P4: Top Overlay "1" at 514.9,-660.2 h20 r270; Top Overlay "2" at 629.8,-656.2 h20 r270; Top Overlay "4" at 614.9,-900.2 h20 r270; Top Overlay "3" at 514.9,-900.2 h20 r270